# Altium PCB {TEX137}_F2837x_controlCARD_R1.3_PCB_PADS.PcbDoc (part 4 of 6)
Units mil, origin at the board's own origin, x right, y up, seen from the top; angles counter-clockwise.
Board outline 4163.98 x 2011.3 mil, 10 copper layers (Primary Side, Inner Layer 2, Inner Layer 3, Inner Layer 4, Inner Layer 5, Inner Layer 6, Inner Layer 7, Inner Layer 8, Inner Layer 9, Secondary Side), stack 103.5 mil thick; 292 components, 317 nets, 1400 pads, 1032 vias.
Unrouted connection lines stored in the file: 106.
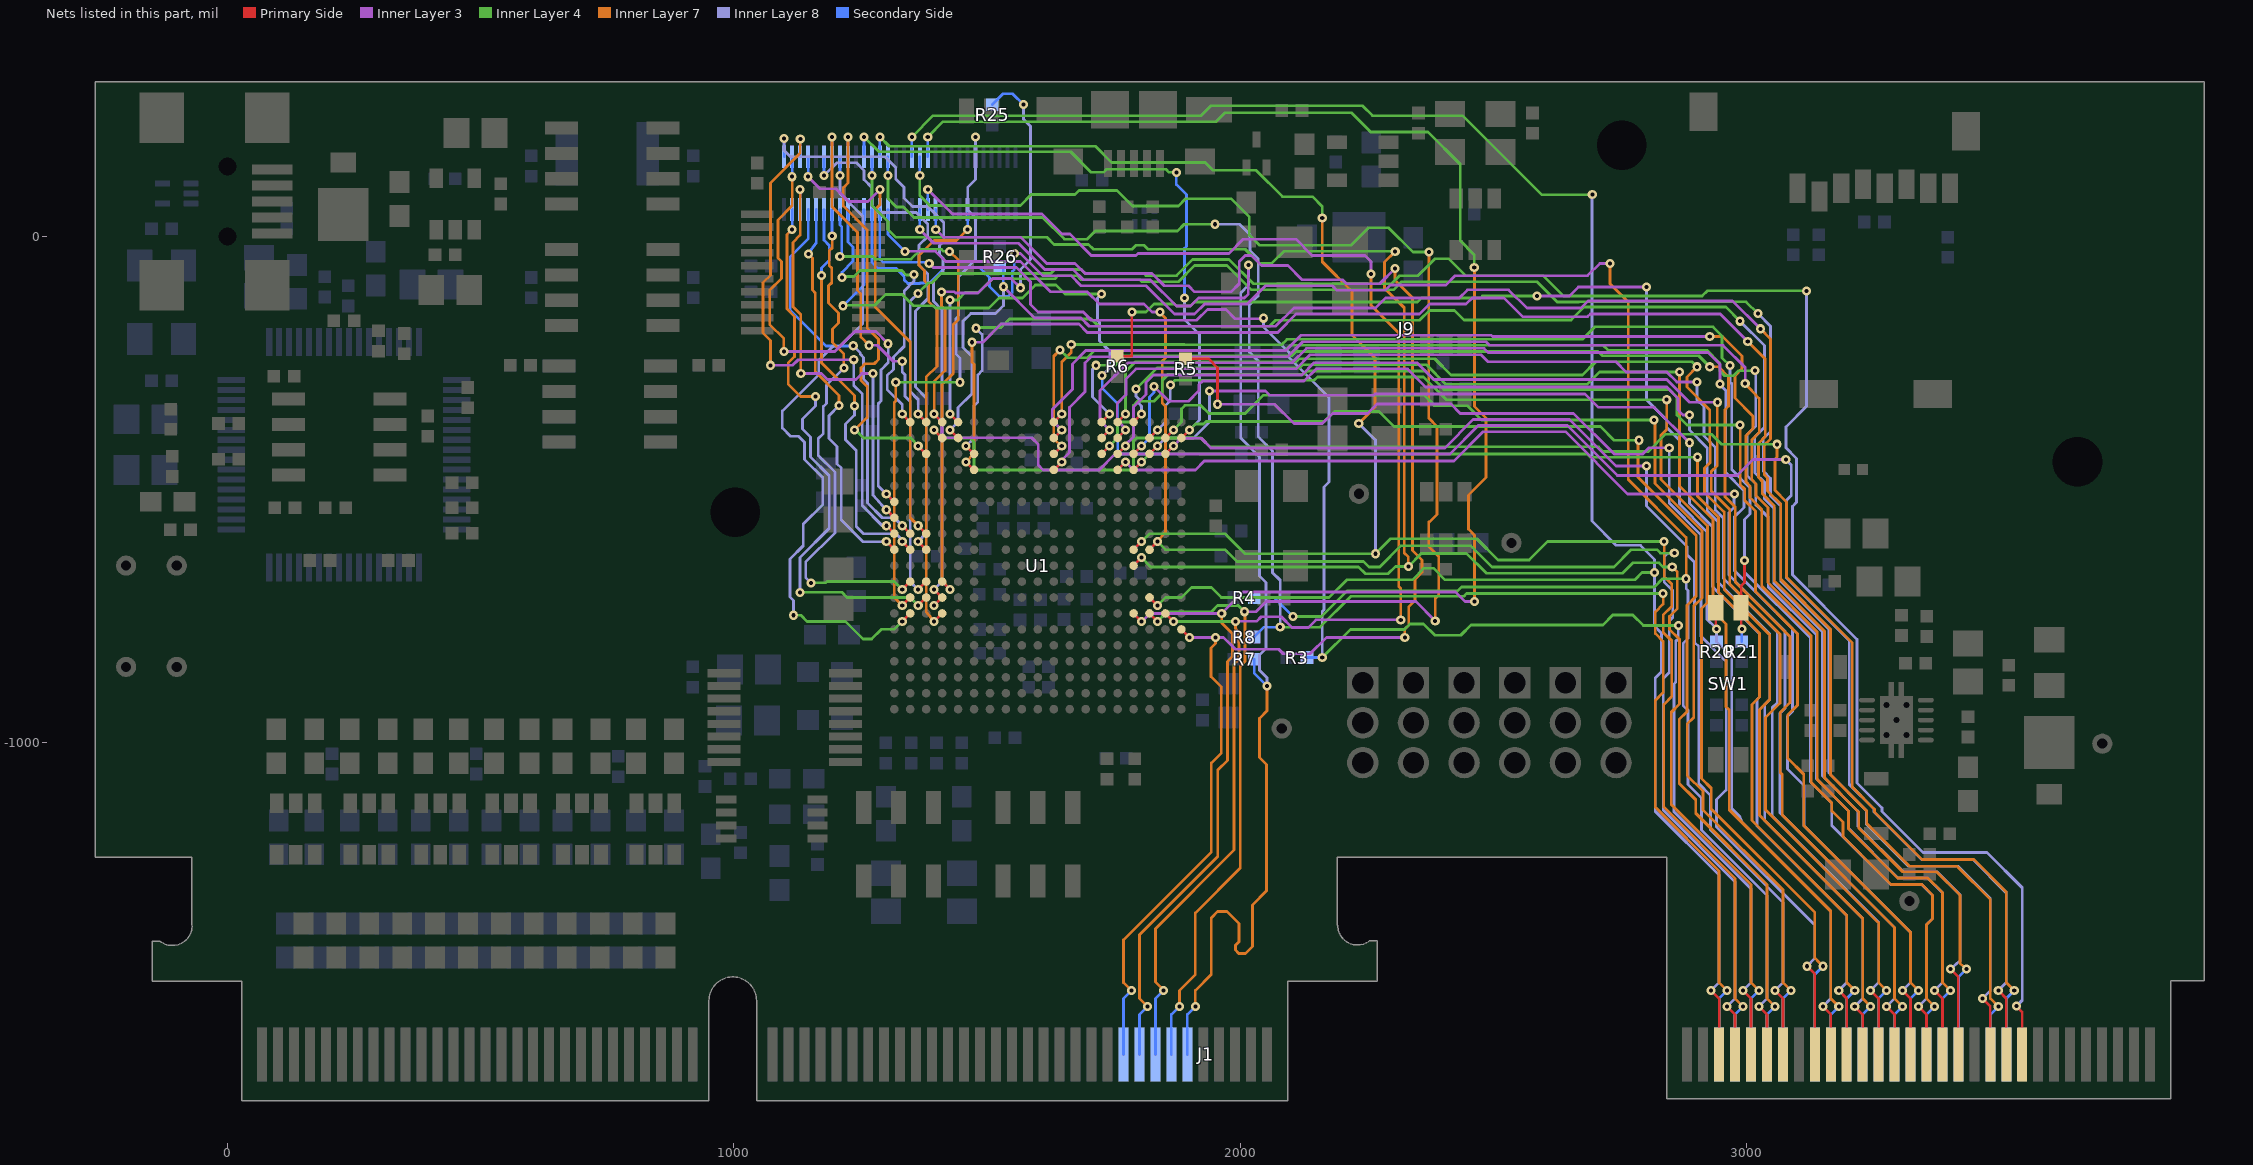
[diagram p12: the nets of this part, all layers, seen from the top]

## Via types
v1: diameter 18, hole 8, Primary Side to Secondary Side, 1025 vias
v2: diameter 28, hole 10, Primary Side to Secondary Side, 7 vias

## Nets (pads, with @x,y where several pads share a name; then routed paths per layer and width w, separated by ;. In a path a pad name is that pad's centre, name@x,y a point inside that pad or via, vN(x,y) a via of type N, cw(c..) or ccw(c..) an arc to the next point about the centre after c; other vN are vias at no path point) (continued)
MCU_GPIO-55_L: J1.102 J9.39 U1.P19 | length 3255.5
  Primary Side w5.3: U1.P19@1883.46,-775.98 v1(1899.21,-791.73)
  Inner Layer 3 w5.5: v1(1398.46,13.85) 1413.85,-1.54 1565.54,-1.54 1617.54,-53.54 1673.54,-53.54 1693.54,-73.54 1825.54,-73.54 1849.54,-97.54 1897.54,-97.54 1909.54,-109.54 1981.54,-109.54 1997.54,-93.54 1997.54,-49.54 2009.54,-37.54 2021.54,-37.54 2041.54,-57.54 2093.54,-57.54 2121.54,-85.54 2201.54,-85.54 2209.54,-93.54 2275.01,-93.54 v1(2305.01,-63.54) ; v1(1899.21,-791.73) 1950.44,-791.73 1966.79,-791.76 1990.05,-815.02 2075.52,-815.02 2084.52,-824.02 2137.51,-824.02 2169.77,-792.03 v1(2324.48,-792.03)
  Inner Layer 7 w5.5: v1(1784.93,-1489.1) 1769.18,-1473.35 1769.18,-1388.85 1942.54,-1215.5 1942.54,-1039.48 1962.23,-1019.79 1962.23,-889.49 1941.97,-869.23 1941.97,-812.48 1950.67,-803.78 1950.67,-791.97 v1(1950.47,-791.76) ; v1(2305.01,-63.54) 2305.01,-86.62 2339.48,-121.1 2339.48,-620.03 2358.48,-639.03 2358.48,-663.06 2344.51,-677.03 2344.51,-718.92 2332.41,-731.02 2332.41,-767.1 2324.48,-775.03 v1(2324.48,-792.03)
  Secondary Side w5.3: v1@1398.43,13.85 J9.39@1398.43,53.22 ; J1.102@1769.17,-1615.1 1769.17,-1504.85 ; 1769.18,-1504.85 v1(1784.93,-1489.1)
MCU_GPIO-56_L: J1.104 J9.38 U1.N16 | length 3736.1
  Primary Side w5.3: U1.N16@1788.98,-744.49 v1(1804.73,-760.24)
  Inner Layer 3 w5.5: v1(1804.73,-760.24) 1822.46,-744.49 v1(1962.99,-744.49) 1975.33,-731.83 2005.13,-702.03 2424.62,-702.03 2443.48,-720.89 v1(2462.35,-720.89)
  Inner Layer 4 w5.5: v1(1382.68,196.53) 1412.62,226.47 1952.27,226.47 1969.77,243.98 2219.5,243.98 2257.28,206.2 2370.24,206.2 2433.98,142.46 2433.98,-8.54 2461.54,-36.57 v1(2461.54,-61.54)
  Inner Layer 7 w5.5: v1(1816.43,-1520.6) 1800.68,-1504.85 1800.68,-1378.83 1955.29,-1224.23 1955.29,-1053.73 1974.54,-1034.48 1974.54,-839.49 1984.54,-829.49 1984.54,-784.49 1962.99,-762.94 v1(1962.99,-744.49) ; v1(2461.54,-61.54) 2462.35,-62.35 2462.35,-335.84 2484.95,-358.44 2484.95,-476.24 2450.35,-510.84 2450.35,-578.02 2462.35,-590.02 v1(2462.35,-720.89)
  Secondary Side w5.3: J9.38@1382.68,157.16 v1(1382.68,196.53) ; J1.104@1800.67,-1615.1 1800.67,-1536.35 ; 1800.68,-1536.35 v1(1816.43,-1520.6)
MCU_GPIO-57_L: J1.106 J9.37 U1.N18 | length 3160.6
  Primary Side w5.3: U1.N18@1851.97,-744.49 v1(1867.72,-760.24)
  Inner Layer 3 w5.5: v1(1382.71,92.6) 1431.35,43.96 1608.04,43.96 1647.54,4.46 1663.54,4.46 1705.54,-37.54 1793.54,-37.54 1797.54,-33.54 1977.54,-33.54 2005.54,-5.54 2109.54,-5.54 2141.54,-37.54 2245.54,-37.54 2257.49,-49.49 v1(2257.49,-74.03) ; v1(1990,-760) 2032.03,-760 2041.02,-751.02 2080.5,-751.02 2101.5,-772.02 2134.04,-772.02 2149.03,-757.02 v1(2316.51,-757.02)
  Inner Layer 4 w5.5: v1(1867.72,-760.24) 1989.76,-760.24 v1(1990,-760)
  Inner Layer 7 w5.5: v1(1847.93,-1489.1) 1847.93,-1487.58 1832.18,-1471.83 1832.18,-1366.83 1987.54,-1211.48 1987.54,-844.49 1996.97,-835.06 1996.97,-781.46 1990,-774.49 v1(1990,-760) ; v1(2257.49,-74.03) 2257.49,-135.88 2312.48,-190.87 2312.48,-690.92 2316.51,-695.02 v1(2316.51,-757.02)
  Secondary Side w5.3: J9.37@1382.68,53.22 v1(1382.71,92.6) ; J1.106@1832.17,-1615.1 1832.17,-1504.85 ; 1832.18,-1504.85 v1(1847.93,-1489.1)
MCU_GPIO-58_L: J1.108 J9.36 U1.N17 | length 3514.5
  Primary Side w5.3: U1.N17@1820.47,-744.49 v1(1836.22,-760.24)
  Inner Layer 3 w5.5: v1(2008,-741) 2031.03,-741 2051,-721.03 2346.48,-721.03 v1(2384.48,-759.03)
  Inner Layer 4 w5.5: v1(1366.96,120.16) 1366.96,80.78 1386.65,61.1 1565.54,61.1 1586.9,82.46 1673.54,82.46 1681.54,90.46 1756.54,90.46 1787.02,59.98 1877.54,59.98 1892.02,74.46 1981.54,74.46 2017.54,38.46 2017.54,2.46 2037.54,-17.54 2218.24,-17.54 2252.74,16.97 2292.47,16.97 2340.44,-31 v1(2372,-31) ; v1(1836.22,-760.24) 1855.46,-741 1942.53,-741 1954.8,-728.73 1995.73,-728.73 v1(2008,-741)
  Inner Layer 7 w5.5: v1(1879.43,-1520.6) 1879.43,-1489.1 1910.93,-1457.6 1910.93,-1335.58 1999.54,-1246.98 1999.54,-848.95 2009,-839.49 2009,-742 v1(2008,-741) ; v1(2372,-31) 2372,-47 2371.72,-47.28 2371.72,-358.84 2387.95,-375.07 2387.95,-548.84 2372.95,-563.84 2371.72,-563.84 2371.72,-612.02 2391.4,-631.71 2391.4,-708.14 2384.48,-715.06 v1(2384.48,-759.03)
  Secondary Side w5.3: v1@1366.93,120.16 J9.36@1366.93,157.16 ; J1.108@1863.67,-1615.1 1863.67,-1536.35 ; 1863.68,-1536.35 v1(1879.43,-1520.6)
MCU_GPIO-59_L: J1.110 J9.35 R7.1 | length 2744.5
  Inner Layer 3 w5.5: v1(1366.96,13.85) 1394.39,-13.58 1561.58,-13.58 1613.54,-65.54 1669.54,-65.54 1689.54,-85.54 1821.54,-85.54 1873.54,-137.54 1901.54,-137.54 1917.54,-121.54 2007.51,-121.54 2015.51,-113.54 2015.51,-57.03 v1(2016.01,-56.54)
  Inner Layer 7 w5.5: v1(1910.93,-1520.6) 1910.93,-1489.1 1942.43,-1457.6 1942.43,-1345.58 1954.91,-1333.1 1973.68,-1333.1 1997.18,-1356.6 1997.18,-1392.6 1990.18,-1399.6 1990.18,-1409.1 1996.68,-1415.6 2010.04,-1415.6 2023.54,-1402.1 2023.54,-1319.98 2051.54,-1291.98 2051.54,-1042.48 2037.54,-1028.48 2037.54,-951.51 2052.46,-936.58 v1(2052.46,-887.51)
  Inner Layer 8 w5.5: v1(2016.01,-56.54) 2016.01,-96.06 2000.48,-111.58 2000.48,-398.42 2037.54,-435.47 2037.54,-670.5 2050.48,-683.45 2050.48,-813.56 2037.54,-826.5 2037.54,-856.51 2052.46,-871.44 v1(2052.46,-887.51)
  Secondary Side w5.3: v1@1366.93,13.85 J9.35@1366.93,53.22 ; J1.110@1895.17,-1615.1 1895.17,-1536.35 ; 1895.18,-1536.35 v1(1910.93,-1520.6) ; R7.1@2027.03,-835.02 2027.03,-862.08 v1(2052.46,-887.51)
MCU_GPIO-60_L: J1.125 J9.34 U1.M17 | length 4400
  Primary Side w5.3: U1.M17@1820.47,-712.99 v1(1836.22,-728.74) ; v1(2929.26,-1489.1) 2945,-1504.85 J1.125@2945,-1615.1
  Inner Layer 4 w5.5: v1(1351.18,196.53) 1392.93,238.28 1922.51,238.28 1942.2,257.98 2240.82,257.98 2260.51,238.28 2438.7,238.28 2594.64,82.34 v1(2694.63,82.34) ; v1(1836.22,-728.74) 1851.94,-713.02 1883.54,-713.02 1903.23,-693.33 1942.6,-693.33 1962.28,-713.02 2175,-713.02 2209.91,-678.1 2339.51,-678.1 2362.59,-655.02 2381.02,-655.02 2404.1,-678.1 2778.39,-678.1 2793.01,-663.48 v1(2817.54,-663.48)
  Inner Layer 8 w5.5: v1(2694.63,82.34) 2694,81.71 2694,-562 2742,-610 2789.54,-610 2817.54,-638 v1(2817.54,-663.48) 2817.54,-769.48 2831.54,-783.48 2831.54,-859.46 2819.01,-871.99 2819.01,-1135.05 2945.01,-1261.05 2945.01,-1473.35 v1(2929.26,-1489.1)
  Secondary Side w5.3: J9.34@1351.18,157.16 v1(1351.18,196.53)
MCU_GPIO-61_L: J1.126 J9.28 R8.1 | length 3503.1
  Inner Layer 4 w5.5: v1(1303.96,120.16) 1303.96,74.49 1320.47,57.98 1334.64,57.98 1355.15,37.47 1609.54,37.47 1652.51,-5.51 1697.48,-5.51 1713.45,10.46 1875.45,10.46 1888.96,23.98 v1(1949.49,23.97) ; v1(2078.51,-771.54) 2157.04,-771.54 2217.97,-710.6 2440.99,-710.6 2446.48,-705.1 v1(2834.56,-705.1)
  Inner Layer 7 w5.5: v1(2834.56,-705.1) 2834.56,-726.1 2819.06,-741.6 2819.06,-783.98 2834.56,-799.48 2834.56,-900.46 2818.94,-916.05 2818.94,-1126.85 2945.01,-1252.92 2945.01,-1473.35 v1(2960.76,-1489.1)
  Inner Layer 8 w5.5: v1(1949.49,23.97) 1998.07,23.97 2018.88,3.16 2018.88,-27.91 2035,-44.03 2035,-117.54 2017.54,-135 2017.54,-228.07 2035,-245.54 2035,-394.96 2063.54,-423.5 2063.54,-664.02 2078.51,-679 2078.51,-760.02 v1(2078.51,-771.54)
  Secondary Side w5.3: v1@1303.94,120.16 J9.28@1303.94,157.16 ; R8.1@2027.03,-791.02 2046.51,-771.54 v1(2078.51,-771.54) ; J1.126@2945.01,-1615.1 2945.01,-1504.85 v1(2960.76,-1489.1)
MCU_GPIO-62_L: J1.127 J9.27 U1.J17 | length 3326.1
  Primary Side w5.5: U1.J17@1820.47,-618.5 v1(1836.26,-602.77) ; v1(2960.76,-1520.6) 2976.5,-1536.34 J1.127@2976.5,-1615.1
  Inner Layer 3 w5.5: v1(1337.54,-29.54) 1398.29,-29.54 1418.29,-49.54 1565.54,-49.54 1625.54,-109.54 1697.54,-109.54 1721.54,-133.54 1809.54,-133.54 1825.54,-149.54 v1(1841.54,-149.54)
  Inner Layer 4 w5.5: v1(1836.26,-602.77) 1851.97,-618.48 1969.61,-618.48 1992.82,-641.69 2242.67,-641.69 2253.59,-652.6 2275.09,-652.6 2317.09,-610.6 2454.51,-610.6 2496.51,-652.6 2737.41,-652.6 2771.53,-618.48 2822.54,-618.48 2829.54,-625.48 v1(2856.54,-625.48)
  Inner Layer 7 w5.5: v1(1836.26,-602.77) 1851.97,-584.03 1851.97,-335.55 1845.54,-329.12 1845.54,-246.46 1851.97,-240.03 1851.97,-161.54 1841.54,-151.1 v1(1841.54,-149.54)
  Inner Layer 8 w5.5: v1(2856.54,-625.48) 2843.54,-625.48 2836.54,-632.48 2836.54,-682.48 2853.54,-699.48 2853.54,-752.48 2846.54,-759.48 2846.54,-860.81 2834.76,-872.58 2834.76,-1132.8 2976.51,-1274.55 2976.51,-1504.85 v1(2960.76,-1520.6)
  Secondary Side w5.5: J9.27@1303.94,53.22 1303.94,4.06 v1(1337.54,-29.54)
MCU_GPIO-63_L: J1.128 J9.26 U1.J16 | length 3958.2
  Primary Side w5.3: U1.J16@1788.98,-618.5 v1(1804.73,-602.75)
  Inner Layer 4 w5.5: v1(1288.18,196.53) 1306.75,177.97 1713.54,177.97 1745.54,145.97 1930.49,145.97 1945.99,130.46 2031.02,130.46 2083.09,78.4 2142.05,78.4 2161.49,58.97 v1(2161.49,35.97) ; v1(1804.73,-602.75) 1820.46,-587.02 1969.33,-587.02 2008.91,-626.6 v1(2266.48,-626.6) 2296.06,-597.02 2466.51,-597.02 2508.51,-639.02 2569.97,-639.02 2606.51,-602.48 v1(2836.54,-602.48)
  Inner Layer 7 w5.5: v1(2161.49,35.97) 2161.49,-50.03 2220.01,-108.55 2220.01,-194.54 2265.54,-240.06 2265.54,-337.54 v1(2233.54,-369.54) ; v1(2836.54,-602.48) 2836.54,-671.48 2851.54,-686.48 2851.54,-730.6 2834.56,-747.58 2834.56,-781.48 2851.54,-798.45 2851.54,-908.46 2835.91,-924.09 2835.91,-1126.85 2976.51,-1267.46 2976.51,-1504.85 v1(2992.26,-1520.6)
  Inner Layer 8 w5.5: v1(2233.54,-369.54) 2265.54,-401.54 2266.48,-401.54 v1(2266.48,-626.6)
  Secondary Side w5.3: J9.26@1288.19,157.16 v1(1288.18,196.53) ; J1.128@2976.51,-1615.1 2976.51,-1536.35 v1(2992.26,-1520.6)
MCU_GPIO-64_L: J1.129 J9.25 R3.2 | length 3399.5
  Primary Side w5.3: v1(2992.26,-1489.1) 3008,-1504.84 J1.129@3008,-1615.1
  Inner Layer 3 w5.5: v1(1385.54,-53.54) 1393.54,-61.54 1557.54,-61.54 1585.54,-89.54 1585.54,-134.54 1600.54,-149.54 1689.54,-149.54 1705.54,-165.54 1913.54,-165.54 1934.79,-144.28 1971.28,-144.28 1989.54,-162.54 2045.54,-162.54 v1(2045.54,-161.54)
  Inner Layer 4 w5.5: v1(2161.54,-831.54) 2217.04,-776.03 2323.48,-776.03 2334.48,-765.03 2361.48,-765.03 2383.98,-787.53 2434.98,-787.53 2455.52,-766.99 2715.5,-766.99 2735.01,-747.48 2774.44,-747.48 2795.44,-768.48 v1(2864.54,-768.48)
  Inner Layer 8 w5.5: v1(2045.54,-161.54) 2045.54,-178.91 2096.16,-229.54 2096.16,-239.14 2174.91,-317.89 2174.91,-485.02 2165.06,-494.86 2165.06,-737.05 2161.54,-740.57 v1(2161.54,-831.54) ; v1(2864.54,-768.48) 2864.54,-794.1 2859.36,-799.28 2859.36,-880.03 2855.89,-883.5 2855.89,-1135.93 3008.01,-1288.05 3008.01,-1473.35 v1(2992.26,-1489.1)
  Secondary Side w5.3: J9.25@1288.19,53.22 1288.19,-44.49 1294.63,-50.92 1382.92,-50.92 v1(1385.54,-53.54) ; R3.2@2131.54,-831.54 v1(2161.54,-831.54)
MCU_GPIO-65_L: J1.130 J9.24 U1.K16 | length 4047.8
  Primary Side w5.3: U1.K16@1788.98,-650 v1(1804.73,-634.25)
  Inner Layer 4 w5.5: v1(1272.46,120.16) 1272.46,61.1 1303.93,29.6 1303.93,13.85 1319.32,-1.54 1617.54,-1.54 1632.02,-16.02 1700.02,-16.02 1709.54,-25.53 1785.54,-25.53 1793.53,-17.54 1809.54,-17.54 1817.54,-25.53 2009.54,-25.53 2037.54,-53.54 2061.53,-53.54 2085.53,-29.54 v1(2305.51,-29.54) ; v1(1804.73,-634.25) 1822.96,-652.48 2233.19,-652.48 2246.71,-666 2291.48,-666 2305.96,-651.52 v1@2331.48,-651.52 ; v1(2331.48,-652.03) v1@2331.48,-651.52 ; v1(2852.54,-652.48) 2834.54,-652.48 2826.54,-644.48 2774.54,-644.48 2754.01,-665 2485.51,-665 2446.53,-626.02 2356.98,-626.02 v1@2331.48,-651.52
  Inner Layer 7 w5.5: v1(2305.51,-29.54) 2284.51,-50.54 2284.51,-102.54 2323.48,-141.02 2323.48,-625.03 2331.48,-633.03 v1(2331.48,-652.03) ; v1(2852.54,-652.48) 2862.54,-662.48 2862.54,-734.48 2846.91,-750.1 2846.91,-775.83 2866.54,-795.45 2866.54,-923.46 2850.44,-939.56 2850.44,-1121.91 3008.01,-1279.48 3008.01,-1473.35 v1(3023.76,-1489.1)
  Secondary Side w5.3: v1@1272.44,120.16 J9.24@1272.44,157.16 ; J1.130@3008.01,-1615.1 3008.01,-1504.85 v1(3023.76,-1489.1)
MCU_GPIO-66_L: J1.131 J9.23 R4.2 | length 4417.5
  Primary Side w5.3: v1(3023.75,-1520.6) 3039.49,-1536.34 J1.131@3039.49,-1615.1
  Inner Layer 3 w5.5: v1(1553.54,-33.54) 1565.54,-33.54 1609.54,-77.54 1665.54,-77.54 1685.54,-97.54 1813.54,-97.54 1869.54,-153.54 1909.54,-153.54 1929.54,-133.54 2013.54,-133.54 2049.54,-97.54 2181.54,-97.54 2190.56,-106.56 2285.44,-106.56 2296.23,-95.77 2405.77,-95.77 2424,-77.54 2685.54,-77.54 2709.54,-53.54 v1(2729.54,-53.54)
  Inner Layer 4 w5.5: v1(2103.54,-750.54) 2160.04,-750.54 2210.51,-700.06 2428.72,-700.06 2436.48,-692.3 2817.21,-692.3 2833.53,-675.98 v1(2880,-675.98)
  Inner Layer 7 w5.5: v1(2729.54,-53.54) 2729.54,-93.54 2765.53,-129.54 2765.53,-480.06 2880,-594.53 v1(2880,-675.98)
  Inner Layer 8 w5.5: v1(2880,-675.98) 2880,-695.48 2883.54,-699.02 2883.54,-794.1 2874.06,-803.58 2874.06,-926.1 2883.54,-935.58 2883.54,-1082.1 2910.06,-1108.63 2910.06,-1172.1 3039.51,-1301.55 3039.51,-1504.84 v1(3023.75,-1520.6)
  Secondary Side w5.3: J9.23@1272.44,53.22 1272.44,-51.51 1284.25,-63.32 1320.47,-63.32 1336.22,-79.07 1336.22,-86.03 1343.22,-93.03 1366.99,-93.03 1368,-92.02 1385.99,-92.02 1416.99,-61.02 1484.46,-61.02 1504.46,-81.02 1504.46,-99.02 1523.98,-118.54 1541.54,-118.54 1549.54,-110.54 1549.54,-68.98 1553.54,-64.98 v1(1553.54,-33.54) ; R4.2@2027.03,-713.02 2066.02,-713.02 v1(2103.54,-750.54)
MCU_GPIO-67_L: J1.132 J9.22 U1.B19 | length 3538.2
  Primary Side w5.3: U1.B19@1883.46,-398.03 v1(1899.21,-382.28)
  Inner Layer 4 w5.5: v1(1256.68,196.53) 1286.25,166.97 1665.03,166.97 1705.54,126.46 1729.54,126.46 1735.55,132.48 1853,132.48 1859.02,126.46 v1(1873.54,126.46) ; v1(1899.21,-382.28) 1911.05,-370.45 1926.82,-370.45 1931.73,-365.54 2165.54,-365.54 2185.54,-345.54 2273.54,-345.54 2303.13,-375.13 2710.46,-375.13 2737.81,-402.48 v1(2786.54,-402.48)
  Inner Layer 7 w5.5: v1(2786.54,-402.48) 2785.04,-402.48 2785.04,-475.56 2899.98,-590.5 2899.98,-710.02 2881.54,-728.46 2881.54,-938.46 2866.19,-953.81 2866.19,-1079.6 2898.84,-1112.25 2898.84,-1138.81 3039.51,-1279.48 3039.51,-1504.85 v1(3055.26,-1520.6)
  Inner Layer 8 w5.5: v1(1889.54,-121.54) 1889.54,-164.14 1918.93,-193.54 1918.93,-362.56 v1(1899.21,-382.28)
  Secondary Side w5.3: J9.22@1256.69,157.16 v1(1256.68,196.53) ; v1(1873.54,126.46) 1873.54,102.46 1893.54,82.46 1893.54,-19.65 1889.54,-23.65 v1(1889.54,-121.54) ; J1.132@3039.51,-1615.1 3039.51,-1536.35 v1(3055.26,-1520.6)
MCU_GPIO-68_L: J1.133 J9.21 U1.C18 | length 3544.2
  Primary Side w5.3: U1.C18@1851.97,-429.53 v1(1867.72,-413.78) ; v1(3055.25,-1489.1) 3070.99,-1504.84 J1.133@3070.99,-1615.1
  Inner Layer 3 w5.5: v1(1867.72,-413.78) 1882.98,-398.52 1922.52,-398.52 1941.54,-417.54 2403.46,-417.54 2459.46,-361.54 2649.54,-361.54 2741.54,-453.54 v1(2801.54,-453.54)
  Inner Layer 4 w5.5: v1(1215.48,-137.03) 1216.48,-136.03 1277.96,-136.03 1299.48,-114.51 1332.23,-114.51 1354.75,-137.03 1393.54,-137.03 1398.04,-141.54 1503.49,-141.54 1523.49,-121.54 1569.54,-121.54 1595.04,-96.03 1636.03,-96.03 1653.54,-113.54 v1(1725.54,-113.54)
  Inner Layer 8 w5.5: v1(1725.54,-113.54) 1717.54,-121.54 1717.54,-165.54 1721.54,-169.54 1721.54,-206.35 1741.97,-226.78 1741.97,-259.49 v1(1726.97,-274.49) ; v1(2801.54,-453.54) 2801.54,-532.48 2881.54,-612.48 2881.54,-628.48 2896.53,-643.47 2896.53,-801.53 2905,-810 2905,-1080.57 2928.06,-1103.63 2928.06,-1172.1 3071.01,-1315.05 3071.01,-1473.34 v1(3055.25,-1489.1)
  Secondary Side w5.3: v1(1215.48,-137.03) 1256.69,-95.82 J9.21@1256.69,53.22 ; v1(1726.97,-274.49) 1726.97,-299.49 1757.48,-330 1757.48,-425 1761.97,-429.49 1852.01,-429.49 v1(1867.72,-413.78)
MCU_GPIO-69_L: J1.134 U1.B18 | length 2444.6
  Primary Side w5.3: U1.B18@1851.97,-398.03 v1(1867.72,-382.28)
  Inner Layer 4 w5.5: v1(1867.72,-382.28) 1883.51,-366.49 1883.51,-340.5 1890.48,-333.54 1921.54,-333.54 1937.54,-349.54 2009.54,-349.54 2045.54,-313.54 2362.54,-313.54 2383.5,-334.5 2448.02,-334.5 2476,-362.48 v1(2816.54,-362.48)
  Inner Layer 7 w5.5: v1(2816.54,-362.48) 2818.54,-362.48 2818.54,-488.06 2910.98,-580.5 2910.98,-714.02 2895,-730 2895,-950 2881.94,-963.06 2881.94,-1064.1 2913.19,-1095.35 2913.19,-1132.14 3071.01,-1289.96 3071.01,-1473.35 v1(3086.76,-1489.1)
  Secondary Side w5.3: J1.134@3071.01,-1615.1 3071.01,-1504.85 v1(3086.76,-1489.1)
MCU_GPIO-70_L: J1.137 R5.2 | length 2457.6
  Primary Side w5.3: R5.2@1891.54,-241.54 1936.54,-241.54 1954.54,-259.54 v1(1954.54,-331.48) ; v1(3118.26,-1441) 3133.98,-1456.72 J1.137@3133.98,-1615.1
  Inner Layer 3 w5.5: v1(1954.54,-331.48) 2067.48,-331.48 2105.54,-369.54 2161.54,-369.54 2181.54,-349.54 2251,-349.54 2269.54,-331 2415.46,-331 2434,-349.54 2657.54,-349.54 2738.1,-430.1 2793.56,-430.1 2806.18,-417.48 v1(2846.54,-417.48)
  Inner Layer 8 w5.5: v1(2846.54,-417.48) 2846.54,-526.58 2909.47,-589.51 2909.47,-789.47 2958.97,-838.97 2958.97,-1093.19 2940.06,-1112.1 2940.06,-1166.1 3134.01,-1360.05 3134.01,-1424.5 v1(3118.26,-1441)
MCU_GPIO-71_L: J1.138 U1.B17 | length 2572.4
  Primary Side w5.3: U1.B17@1820.47,-398.03 v1(1836.22,-382.28)
  Inner Layer 4 w5.5: v1(1861.54,-293.54) 1870.97,-284.1 2145.54,-284.1 2152.1,-277.54 2361.59,-277.54 2406.54,-322.48 v1(2841.54,-322.48)
  Inner Layer 7 w5.5: v1(2841.54,-322.48) 2841.54,-381.48 2830.54,-392.48 2830.54,-480.06 2921.98,-571.5 2921.98,-723.02 2910,-735 2910,-1070 2929.53,-1089.53 2929.53,-1130.47 3134.01,-1334.96 3134.01,-1424.5 v1(3149.76,-1441)
  Inner Layer 8 w5.5: v1(1836.22,-382.28) 1851.97,-366.54 1851.97,-333.54 1861.54,-323.97 v1(1861.54,-293.54)
  Secondary Side w5.3: J1.138@3134.01,-1615.1 3134.01,-1456.75 v1(3149.76,-1441)
MCU_GPIO-72_L: J1.139 R6.2 R20.2 SW1.2 | length 2901.2
  Primary Side w5.3: R6.2@1756.54,-236.54 1785.54,-236.54 v1(1785.54,-149.54) ; SW1.2@2938.46,-733.46 2938.46,-773.46 v1(2940,-775) ; v1(3149.76,-1520.6) 3165.48,-1536.32 J1.139@3165.48,-1615.1
  Inner Layer 3 w5.5: v1(2585.54,-117.54) 2649.48,-117.54 2667.04,-99.98 v1(2801.54,-99.98)
  Inner Layer 4 w5.5: v1(1785.54,-149.54) 1813.54,-149.54 1829.54,-133.54 1869.54,-133.54 1873.54,-137.54 1901.54,-137.54 1909.54,-129.54 2349.54,-129.54 2357.54,-121.54 2473.54,-121.54 2477.54,-117.54 v1(2585.54,-117.54)
  Inner Layer 8 w5.5: v1(2801.54,-99.98) 2801.54,-322.48 2841.54,-362.48 2841.54,-377.48 2866.54,-402.48 2866.54,-528.58 2920.47,-582.51 2920.47,-755.01 2938.98,-773.52 v1(2940,-775) 2940,-800 2970,-830 2970,-1130 2985.74,-1145 2989.26,-1155.74 3165.51,-1331.99 3165.51,-1504.85 v1(3149.76,-1520.6)
  Secondary Side w5.3: R20.2@2940,-800 v1(2940,-775)
MCU_GPIO-73_L: J1.140 U1.A16 | length 2679.7
  Primary Side w5.3: U1.A16@1788.98,-366.54 v1(1804.74,-350.78)
  Inner Layer 4 w5.5: v1(1793.54,-301.54) 1834.97,-260.1 2116.24,-260.1 2122.81,-253.54 2367.59,-253.54 2406.16,-292.1 2684.07,-292.1 2708.69,-267.48 v1(2866.54,-267.48)
  Inner Layer 7 w5.5: v1(2866.54,-267.48) 2866.54,-492.88 2932.98,-559.32 2932.98,-739.51 2958.46,-765 2958.46,-928.46 2965.1,-935.1 2965.1,-1132.07 3165.51,-1332.48 3165.51,-1504.85 v1(3181.26,-1520.6)
  Inner Layer 8 w5.5: v1(1793.54,-301.54) 1793.54,-315.58 1799.49,-321.54 1799.49,-330.03 1804.74,-335.28 v1(1804.74,-350.78)
  Secondary Side w5.3: J1.140@3165.51,-1615.1 3165.51,-1536.35 v1(3181.26,-1520.6)
MCU_GPIO-74_L: J1.141 U1.C17 | length 2550.9
  Primary Side w5.3: U1.C17@1820.47,-429.53 v1(1836.22,-413.78) ; v1(3181.26,-1489.1) 3196.97,-1504.81 J1.141@3196.97,-1615.1
  Inner Layer 3 w5.5: v1(1938.65,-305.54) 2049.54,-305.54 2057.54,-313.54 2262.95,-313.54 2265.54,-310.95 2680.01,-310.95 2706.54,-337.48 2816.54,-337.48 v1(2886.54,-407.48)
  Inner Layer 8 w5.5: v1(1836.22,-413.78) 1852.02,-397.98 1907.09,-397.98 1938.65,-366.42 v1(1938.65,-305.54) ; v1(2886.54,-407.48) 2886.54,-527.48 2931.47,-572.42 2931.47,-691.04 3025,-784.57 3025,-909.54 3020,-914.54 3020,-1163.98 3197.01,-1340.99 3197.01,-1473.35 v1(3181.26,-1489.1)
MCU_GPIO-75_L: J1.142 U1.D16 | length 2455.9
  Primary Side w5.3: U1.D16@1788.98,-461.02 v1(1804.73,-445.27)
  Inner Layer 4 w5: 1820.81,-429.48 1919.51,-429.48
  Inner Layer 4 w5.5: v1(1804.73,-445.27) 1820.52,-429.48 1820.81,-429.48 ; 1919.51,-429.48 2684.54,-429.48 2691.04,-435.98 v1(2902.54,-435.98)
  Inner Layer 7 w5.5: v1(2902.54,-435.98) 2902.54,-512.98 2943.98,-554.42 2943.98,-702.52 3025,-783.54 3025,-909.54 3010,-924.54 3010,-1153.47 3197.01,-1340.48 3197.01,-1473.35 v1(3212.76,-1489.1)
  Secondary Side w5.3: J1.142@3197.01,-1615.1 3197.01,-1504.85 v1(3212.76,-1489.1)
MCU_GPIO-76_L: J1.143 U1.C16 | length 2729.5
  Primary Side w5.3: U1.C16@1788.98,-429.53 v1(1804.73,-413.78) ; v1(3212.76,-1520.6) 3228.47,-1536.31 J1.143@3228.47,-1615.1
  Inner Layer 3 w5.5: v1(1829.49,-296.03) 1858.99,-325.54 1897.54,-325.54 1917.54,-305.54 1917.54,-293.54 1925.54,-285.54 2125.54,-285.54 2149.54,-261.54 2329.59,-261.54 2365.54,-297.48 2841.54,-297.48 2864.04,-319.98 2864.04,-342.48 2874.04,-352.48 v1(2886.54,-352.48)
  Inner Layer 8 w5.5: v1(2886.54,-352.48) 2886.54,-382.48 2921.54,-417.48 2921.54,-542.48 2942.47,-563.42 2942.47,-682.51 3045,-785.04 3045,-914.54 3035,-924.54 3035,-1153.49 3228.51,-1347 3228.51,-1504.85 v1(3212.76,-1520.6)
  Secondary Side w5.3: v1(1804.73,-413.78) 1820.5,-398 1820.5,-317.03 1829.49,-308.05 v1(1829.49,-296.03)
MCU_GPIO-77_L: J1.144 U1.A15 | length 2821.6
  Primary Side w5.3: U1.A15@1757.48,-366.54 v1(1773.23,-350.79)
  Inner Layer 4 w5.5: v1(1773.23,-350.79) 1773.23,-267.29 1793.04,-247.48 2109.54,-247.48 2115.48,-241.54 2383.54,-241.54 2415.48,-273.48 2675.48,-273.48 2701.48,-247.48 2891.54,-247.48 v1(2901.54,-257.48)
  Inner Layer 7 w5.5: v1(2901.54,-257.48) 2881.54,-277.48 2881.54,-297.48 2926.54,-342.48 2926.54,-405.48 2927.54,-406.48 2927.54,-446.1 2916.06,-457.58 2916.06,-505.3 2954.98,-544.22 2954.98,-696.97 3045,-786.99 3045,-914.54 3025,-934.54 3025,-1142.97 3228.51,-1346.48 3228.51,-1504.85 v1(3244.26,-1520.6)
  Secondary Side w5.3: J1.144@3228.51,-1615.1 3228.51,-1536.35 v1(3244.26,-1520.6)
MCU_GPIO-78_L: J1.145 U1.B15 | length 2803.9
  Primary Side w5.3: U1.B15@1757.48,-398.03 v1(1773.23,-382.28) ; v1(3244.26,-1489.1) 3259.96,-1504.81 J1.145@3259.96,-1615.1
  Inner Layer 3 w5.5: v1(1773.23,-382.28) 1773.23,-379.79 1756.98,-363.54 1756.98,-329.54 1773.98,-312.54 1773.98,-281.54 1793.98,-261.54 2109.54,-261.54 2137.39,-233.68 2474.68,-233.68 2488.48,-247.48 2741.54,-247.48 2761.54,-267.48 2841.54,-267.48 2861.54,-287.48 v1(2901.54,-287.48)
  Inner Layer 8 w5.5: v1(2901.54,-287.48) 2901.54,-322.48 2915.04,-335.98 2915.04,-393.98 2937.54,-416.48 2937.54,-540.48 2953.47,-556.42 2953.47,-675.51 3060,-782.04 3060,-920.54 3050,-930.54 3050,-1143.99 3260.01,-1354 3260.01,-1473.35 v1(3244.26,-1489.1)
MCU_GPIO-79_L: J1.146 U1.C15 | length 2806.8
  Primary Side w5.3: U1.C15@1757.48,-429.53 v1(1773.23,-413.78)
  Inner Layer 3 w5.5: v1(1773.23,-413.78) 1773.23,-411.48 1788.98,-395.73 1788.98,-337.01 1813.54,-312.45 1813.54,-288.48 1828.48,-273.54 2121.54,-273.54 2145.54,-249.54 2348.59,-249.54 2381.54,-282.48 2841.54,-282.48 2886.54,-327.48 v1(2941.54,-327.48)
  Inner Layer 7 w5.5: v1(2941.54,-327.48) 2941.54,-452.1 2929.54,-464.1 2929.54,-502.88 2965.98,-539.32 2965.98,-686.52 3065,-785.54 3065,-921.54 3036.54,-950 3036.54,-1132.01 3260.01,-1355.48 3260.01,-1473.35 v1(3275.76,-1489.1)
  Secondary Side w5.3: J1.146@3260.01,-1615.1 3260.01,-1504.85 v1(3275.76,-1489.1)
MCU_GPIO-80_L: J1.147 U1.D15 | length 2580.9
  Primary Side w5.3: U1.D15@1757.48,-461.02 v1(1773.23,-445.27) ; v1(3275.76,-1520.6) 3291.51,-1536.35 3291.51,-1615.05 J1.147@3291.46,-1615.1
  Inner Layer 3 w5.5: v1(1773.23,-445.27) 1788.98,-461.02 1911.01,-461.02 1928.49,-443.54 2421.46,-443.54 2479.46,-385.54 2641.54,-385.54 2764.48,-508.48 v1(2975.04,-508.48)
  Inner Layer 8 w5.5: v1(2975.04,-508.48) 2974.54,-508.48 2974.54,-535 2964.47,-545.06 2964.47,-668.51 3075,-779.04 3075,-931.54 3065,-941.54 3065,-1137.94 3291.51,-1364.46 3291.51,-1504.85 v1(3275.76,-1520.6)
MCU_GPIO-81_L: J1.148 U1.A14 | length 2925.2
  Primary Side w5.3: U1.A14@1725.98,-366.54 v1(1741.73,-350.79)
  Inner Layer 4 w5.5: v1(1715.01,-254.54) 1752.68,-254.54 1771.51,-235.7 2101.54,-235.7 2110.21,-227.03 2705.81,-227.03 2714.48,-235.7 2904.76,-235.7 v1(2926.54,-257.48)
  Inner Layer 7 w5.5: v1(2926.54,-257.48) 2943.84,-257.48 2963.76,-277.4 2963.76,-335.25 2956.54,-342.48 2956.54,-513.98 2976.98,-534.42 2976.98,-682.47 3085,-790.49 3085,-920.61 3065.61,-940 3065.61,-1058.56 3069.76,-1062.71 3069.76,-1142.72 3099.54,-1172.51 3291.51,-1364.48 3291.51,-1504.85 v1(3307.26,-1520.6)
  Inner Layer 8 w5.5: v1(1715.01,-254.54) 1707.73,-261.82 1707.73,-316.78 v1(1741.73,-350.79)
  Secondary Side w5.3: J1.148@3291.51,-1615.1 3291.51,-1536.35 v1(3307.26,-1520.6)
MCU_GPIO-82_L: J1.149 U1.B14 | length 2936.9
  Primary Side w5.3: U1.B14@1725.98,-398.03 v1(1741.73,-382.28) ; v1(3307.26,-1489.1) 3322.96,-1504.8 J1.149@3322.96,-1615.1
  Inner Layer 3 w5.5: v1(1741.73,-382.28) 1722.68,-363.23 1722.68,-304.39 1777.54,-249.54 2101.54,-249.54 2130.04,-221.03 2481.03,-221.03 2489.28,-229.28 2923.32,-229.28 2946.56,-252.48 v1(2946.56,-291.1)
  Inner Layer 8 w5.5: v1(2946.56,-291.1) 2945.54,-292.13 2945.54,-291.48 2958.06,-304.01 2958.06,-466.55 2994.06,-502.55 2994.06,-535 2975.47,-553.59 2975.47,-660.04 3090,-774.57 3090,-937.54 3080,-947.54 3080,-1051.3 3112.63,-1083.93 3112.63,-1163.57 3323.01,-1373.96 3323.01,-1473.35 v1(3307.26,-1489.1)
MCU_GPIO-83_L: J1.150 U1.C14 | length 2850.3
  Primary Side w5.3: U1.C14@1725.98,-429.53 v1(1741.73,-413.78)
  Inner Layer 4 w5.5: v1(1741.73,-413.78) 1757.52,-397.99 1757.52,-370.44 1761.46,-366.5 1781.15,-366.5 1789.02,-358.62 1789.02,-333.54 1797.02,-325.54 1829.54,-325.54 1845.54,-309.54 1845.54,-284.1 1857.54,-272.1 2125.54,-272.1 2132.1,-265.54 2364.59,-265.54 2401.54,-302.48 2846.54,-302.48 2861.54,-317.48 2861.54,-352.48 2881.54,-372.48 v1(2986.54,-372.48)
  Inner Layer 7 w5.5: v1(2986.54,-372.48) 2986.54,-490.18 2995.56,-499.2 2995.56,-521.2 3016.8,-542.44 3016.8,-701.4 3100,-784.6 3100,-925.59 3080.36,-945.22 3080.36,-1030 3112.16,-1061.8 3112.16,-1163.11 3323.01,-1373.96 3323.01,-1473.35 v1(3338.76,-1489.1)
  Secondary Side w5.3: J1.150@3323.01,-1615.1 3323.01,-1504.85 v1(3338.76,-1489.1)
MCU_GPIO-84: J1.151 R21.2 SW1.1 U1.A11 | length 3290.9
  Primary Side w5.3: U1.A11@1631.5,-366.54 v1(1647.25,-350.79) ; v1(2990,-775) 2988.46,-773.46 SW1.1@2988.46,-733.46 2988.46,-690 2995,-683.46 v1(2995,-640) ; v1(3338.76,-1520.6) 3354.51,-1536.35 3354.51,-1615.04 J1.151@3354.45,-1615.1
  Inner Layer 4 w5.5: v1(1665.98,-213.54) 1725.39,-213.54 1725.54,-213.68 1889.13,-213.68 2081.54,-213.78 2092.02,-203.3 2674.75,-203.3 2699.44,-178.6 2932.86,-178.6 2950.86,-196.6 2950.86,-240.1 v1(2966.54,-255.1)
  Inner Layer 7 w5.5: v1(1647.25,-350.79) 1647.25,-247.82 1665.98,-229.09 v1(1665.98,-213.54)
  Inner Layer 8 w5.5: v1(2966.54,-255.1) 2966.54,-287.48 2970.06,-291.01 2970.06,-460.45 3006.06,-496.45 3006.06,-548.1 2995,-559.17 v1(2995,-640) 2995,-663.04 3125.25,-793.29 3125.25,-1076.91 3167.54,-1119.19 3167.54,-1163.48 3283.54,-1279.48 3344.98,-1279.48 3365.6,-1300.1 3365.6,-1347.35 3354.51,-1358.44 3354.51,-1504.85 v1(3338.76,-1520.6)
  Secondary Side w5.3: R21.2@2990,-800 v1(2990,-775)
MCU_GPIO-85_L: J1.152 U1.B11 | length 3151.1
  Primary Side w5.3: U1.B11@1631.5,-398.03 v1(1647.25,-382.28)
  Inner Layer 3 w5.5: v1(1647.25,-382.28) 1628.38,-363.42 1628.38,-341.78 1668.38,-301.78 1668.38,-251.78 1694.62,-225.54 2089.54,-225.54 2120.04,-195.03 2495.03,-195.03 2497.48,-197.48 v1(2926.54,-197.48)
  Inner Layer 7 w5.5: v1(2926.54,-197.48) 2951.54,-197.48 2990.26,-236.21 2990.26,-261.02 2976.24,-275.05 2976.24,-319.2 3012.06,-355.03 3012.06,-379.39 2997.91,-393.55 2997.91,-484.45 3006.16,-492.7 3006.16,-515.9 3029.25,-538.99 3029.25,-690.8 3127.05,-788.6 3127.05,-1078.71 3167.54,-1119.19 3167.54,-1134.48 3189.54,-1156.48 3189.54,-1184.48 3284.54,-1279.48 3345.51,-1279.48 3366.13,-1300.1 3366.13,-1347.35 3354.51,-1358.97 3354.51,-1504.85 v1(3370.26,-1520.6)
  Secondary Side w5.3: J1.152@3354.51,-1615.1 3354.51,-1536.35 v1(3370.26,-1520.6)
MCU_GPIO-86_L: J1.153 U1.C11 | length 3215.5
  Primary Side w5.3: U1.C11@1631.5,-429.53 v1(1647.25,-413.78) ; v1(3370.26,-1489.1) 3385.95,-1504.79 J1.153@3385.95,-1615.1
  Inner Layer 4 w5.5: v1(1644.01,-224.54) 1659.17,-239.7 1697.68,-239.7 1712.68,-224.7 2089.54,-224.7 2099.21,-215.03 2715.81,-215.03 2725.48,-224.7 2920.66,-224.7 2946.06,-250.1 2946.06,-265.1 2956.06,-275.1 2973.56,-275.1 2983.56,-265.1 v1(3016.18,-265.1)
  Inner Layer 7 w5.5: v1(1644.01,-224.54) 1642.68,-225.6 1631.5,-236.78 1631.5,-401.06 v1(1647.25,-413.78)
  Inner Layer 8 w5.5: v1(3016.18,-265.1) 3017.51,-266.43 3017.51,-373.95 3000.51,-390.95 3000.51,-472.9 3001.31,-472.9 3017.51,-489.1 3017.51,-530.08 3042.06,-554.63 3042.06,-692.1 3137.25,-787.29 3137.25,-1070.91 3200.54,-1134.19 3200.54,-1168.54 3298.47,-1266.48 3356.47,-1266.48 3385.94,-1295.95 3385.94,-1473.42 v1(3370.26,-1489.1)
MCU_GPIO-87_L: J1.154 U1.D11 | length 3155.1
  Primary Side w5.3: U1.D11@1631.5,-461.02 v1(1647.25,-445.27)
  Inner Layer 3 w5.5: v1(1647.25,-445.27) 1647.68,-441.78 1662.68,-426.78 1662.68,-337.48 1693.38,-306.78 1693.38,-249.69 1705.54,-237.54 2093.54,-237.54 2123.04,-208.03 2485.03,-208.03 2492.1,-215.1 2952.66,-215.1 2996.54,-258.98 v1(2996.54,-290.1)
  Inner Layer 7 w5.5: v1(2996.54,-290.1) 3024.06,-320.1 3024.06,-387.39 3009.41,-402.05 3009.41,-480 3018.06,-488.65 3018.06,-511.9 3041.25,-535.09 3041.25,-683.49 3138.66,-780.9 3138.66,-1072.32 3200.54,-1134.19 3200.54,-1169.48 3297.54,-1266.48 3357.01,-1266.48 3386.01,-1295.48 3386.01,-1473.35 v1(3401.76,-1489.1)
  Secondary Side w5.3: J1.154@3386.01,-1615.1 3386.01,-1504.85 v1(3401.76,-1489.1)
MCU_GPIO-88: J1.155 U1.C6 | length 3535.4
  Primary Side w5.3: v1(1458.27,-413.78) U1.C6@1474.02,-429.53 ; v1(3401.69,-1446.5) 3417.44,-1462.25 J1.155@3417.44,-1615.1
  Inner Layer 4 w5.5: v1(1477.96,-181.44) 1479.6,-179.8 1527.27,-179.8 1544.22,-162.86 1705.54,-162.86 1720.22,-177.54 2057.54,-177.54 2069.54,-165.54 2353.54,-165.54 2372.97,-146.1 2422.66,-146.1 2441.54,-164.98 2652.93,-164.98 2678.41,-139.5 2958.56,-139.5 v1(2986.54,-167.48)
  Inner Layer 8 w5.5: v1(1458.27,-413.78) 1474.02,-398.5 1474.02,-334.54 1481.5,-327.05 1481.5,-273.56 1490.03,-265.03 1490.03,-193.51 v1(1477.96,-181.44) ; v1(2986.54,-167.48) 3034.54,-215.48 3034.54,-376.92 3015.48,-395.97 3016.04,-466.8 3034.54,-485.3 3034.54,-518.1 3053.25,-536.82 3053.25,-685.29 3149.25,-781.29 3149.25,-1064.91 3218.54,-1134.19 3218.54,-1164.05 3308.97,-1254.48 3374.97,-1254.48 3420.97,-1300.48 3420.97,-1430 v1(3401.69,-1446.5)
MCU_GPIO-89: J1.156 U1.D6 | length 3531.6
  Primary Side w5.3: v1(1458.27,-445.27) U1.D6@1474.02,-461.02
  Inner Layer 3 w5.5: v1(1470.09,-209) 1491.49,-209 1527.46,-173.02 1681.02,-173.02 1697.54,-189.54 2073.54,-189.54 2109.54,-153.54 2353.54,-153.54 2373.54,-133.54 2445.54,-133.54 2457.54,-121.54 2520.2,-121.54 2557.21,-158.55 2685.47,-158.55 2690.74,-153.28 2947.34,-153.28 v1(3001.54,-207.48)
  Inner Layer 7 w5.5: v1(1458.27,-445.27) 1474.02,-429.01 1474.02,-252.31 1470.09,-248.37 v1(1470.09,-209) ; v1(3001.54,-207.48) 3036.06,-242.01 3036.06,-395.39 3022.71,-408.75 3022.71,-476 3030.06,-483.35 3030.06,-508 3054.06,-532 3054.06,-680.4 3153.28,-779.62 3153.28,-1068.94 3220.54,-1136.19 3220.54,-1167.48 3307.54,-1254.48 3374.51,-1254.48 3420.49,-1300.46 3420.49,-1435.5 v1(3433.19,-1446.5)
  Secondary Side w5.3: J1.156@3417.51,-1615.1 3417.51,-1462.18 v1(3433.19,-1446.5)
MCU_GPIO-90: J1.159 U1.A5 | length 3668.9
  Primary Side w5.3: v1(1426.77,-350.79) U1.A5@1442.52,-366.54 ; v1(3464.69,-1504.85) 3480.44,-1520.59 J1.159@3480.44,-1615.1
  Inner Layer 4 w5.5: v1(1426.54,-125.54) 1441.99,-125.54 1456.5,-111.02 1482.99,-111.02 1510.25,-83.76 1633.54,-83.76 1639.76,-77.54 1677.54,-77.54 1685.54,-85.54 1801.54,-85.54 1805.54,-89.54 1877.54,-89.54 1909.54,-57.54 1973.54,-57.54 2021.54,-105.54 2302,-105.54 2318,-89.54 2585.54,-89.54 2625.54,-129.54 2667.98,-129.54 2668.31,-129.2 2998.26,-129.2 v1(3021.54,-152.48)
  Inner Layer 8 w5.5: v1(1426.54,-125.54) 1426.77,-125.77 v1(1426.77,-350.79) ; v1(3021.54,-152.48) 3046.54,-177.48 3046.54,-384.92 3032.21,-399.25 3032.21,-463.4 3046.54,-477.73 3046.54,-512.1 3066.61,-532.18 3066.61,-680.65 3162.06,-776.1 3162.06,-1059.72 3235.54,-1133.19 3235.54,-1160.48 3318.54,-1243.48 3416.96,-1243.48 3480.44,-1306.96 3480.44,-1489.1 v1(3464.69,-1504.85)
MCU_GPIO-91: J1.160 R26.2 U1.B5 | length 3737
  Primary Side w5.3: v1(1426.77,-382.28) U1.B5@1442.52,-398.03
  Inner Layer 3 w5.5: v1(1531.97,-99.49) 1593.54,-161.02 1685.02,-161.02 1701.54,-177.54 2069.54,-177.54 2105.54,-141.54 2266.46,-141.54 2286.5,-121.5 2432.04,-121.5 2448,-105.54 2529.54,-105.54 2565.54,-141.54 2672.48,-141.54 2686.54,-127.48 2971.54,-127.48 v1(3026.54,-182.48)
  Inner Layer 7 w5.5: v1(3026.54,-182.48) 3046.56,-202.5 3046.56,-262.48 3046.46,-400 3034.11,-412.35 3034.11,-470.4 3040.54,-476.83 3040.54,-502.58 3066.6,-528.64 3066.6,-677.04 3165.16,-775.6 3165.16,-1062.82 3236.51,-1134.17 3236.51,-1159.48 3320.51,-1243.48 3414.51,-1243.48 3480.44,-1309.41 3480.44,-1504.85 v1(3496.19,-1520.6)
  Inner Layer 8 w5.5: v1(1426.77,-382.28) 1442.48,-366.57 1442.48,-338.02 1469.51,-310.99 1469.51,-236.11 1452.51,-219.11 1452.51,-167.51 1467.74,-152.29 1516.48,-152.29 1531.97,-136.8 v1(1531.97,-99.49)
  Secondary Side w5.3: R26.2@1525,-60 1531.97,-60 v1(1531.97,-99.49) ; J1.160@3480.51,-1615.1 3480.51,-1536.29 v1(3496.19,-1520.6)
MCU_GPIO-92_L: J1.161 R25.1 U1.A4 | length 4199.8
  Primary Side w5.3: v1(1395.27,-350.79) U1.A4@1411.02,-366.54 ; v1(3496.19,-1489.1) 3511.93,-1504.84 J1.161@3511.93,-1615.1
  Inner Layer 3 w5.5: v1(1395.27,-350.79) 1410.98,-366.49 1410.98,-393.54 1414.98,-397.54 1587.99,-397.54 1600.99,-410.54 1600.99,-451.78 1610.24,-461.02 1721.17,-461.02 1752.68,-429.52 2413.48,-429.52 2469.46,-373.54 2645.54,-373.54 2744.1,-472.1 2980.28,-472.1 3011.68,-440.7 v1(3076.68,-440.7) ; v1(1409.54,-109.54) 1435.06,-109.54 1437.54,-112.01 1482.01,-112.01 1510.99,-83.02 1547.02,-83.02 v1(1565.54,-101.54)
  Inner Layer 7 w5.5: v1(1395.27,-350.79) 1395.27,-286.54 1416.68,-265.13 1416.68,-144.68 1409.54,-137.54 v1(1409.54,-109.54)
  Inner Layer 8 w5.5: v1(1565.54,-101.54) 1565.54,-65.43 1585.43,-45.54 1585.43,217.44 1571.71,231.16 v1(1571.71,260.16) ; v1(3076.68,-440.7) 3087.54,-451.55 3087.54,-511.48 3078.06,-520.95 3078.06,-674.1 3202.04,-798.08 3202.04,-1081.69 3250.54,-1130.19 3250.54,-1136.48 3344.54,-1230.48 3446.46,-1230.48 3511.94,-1295.97 3511.94,-1473.35 v1(3496.19,-1489.1)
  Secondary Side w5.3: R25.1@1510,260 1531.6,281.6 1549.96,281.6 1571.56,260 v1(1571.71,260.16)
MCU_GPIO-93_L: J1.162 U1.B4 | length 3303.8
  Primary Side w5.5: v1(1395.27,-382.28) U1.B4@1411.02,-398.03
  Inner Layer 4 w5.5: v1(1395.27,-382.28) 1411.02,-398.03 1466.13,-398.03 1474.01,-405.91 1474.01,-452.52 1482.51,-461.02 1781.52,-461.02 1789.06,-453.49 1789.06,-403.54 1794.56,-398.03 1922.09,-398.03 1939.53,-415.47 2706.97,-415.47 2715.98,-424.49 2805.51,-424.49 2839.53,-390.47 2929.53,-390.47 2949.53,-410.47 v1(3059.53,-410.47)
  Inner Layer 7 w5.5: v1(3059.53,-410.47) 3059.53,-435.47 3055.18,-439.82 3055.18,-501.32 3078.06,-524.2 3078.06,-672.6 3207.98,-802.52 3207.98,-1087.63 3251.54,-1131.19 3251.54,-1136.48 3345.54,-1230.48 3448.01,-1230.48 3511.94,-1294.41 3511.94,-1473.35 v1(3527.69,-1489.1)
  Secondary Side w5.5: J1.162@3512.01,-1615.1 3512.01,-1504.79 v1(3527.69,-1489.1)
MCU_GPIO-94: J1.163 U1.A3 | length 3948.5
  Primary Side w5.3: v1(1363.78,-350.79) U1.A3@1379.53,-366.54 ; v1(3531.97,-1519.49) 3543.43,-1530.95 J1.163@3543.43,-1615.1
  Inner Layer 4 w5.5: v1(1363.03,-112.52) 1363.53,-112.02 1384.03,-91.53 1390.66,-91.53 1408.65,-73.54 1625.54,-73.54 1633.54,-65.54 1685.54,-65.54 1693.54,-73.54 1809.54,-73.54 1813.54,-77.54 1873.54,-77.54 1905.54,-45.54 1977.54,-45.54 2025.54,-93.54 2298.46,-93.54 2314.46,-77.54 2351,-77.54 2384.54,-44 2410.46,-44 2444,-77.54 2597.54,-77.54 2637.54,-117.54 2658.48,-117.54 2658.54,-117.48 2911.54,-117.48 2921.54,-107.48 v1(3117.54,-107.48)
  Inner Layer 8 w5.5: v1(1363.03,-112.52) 1348.03,-127.52 1348.03,-306.55 1364,-322.52 1364,-350.56 v1(1363.78,-350.79) ; v1(3117.54,-107.48) 3117.54,-335.48 3076.97,-376.05 3076.97,-417.36 3098.04,-438.43 3098.04,-524.98 3090.06,-532.95 3090.06,-668.1 3217.47,-795.51 3217.47,-1079.13 3266.54,-1128.19 3266.54,-1135.48 3347.54,-1216.48 3473.95,-1216.48 3543.44,-1285.97 3543.44,-1508.01 v1(3531.97,-1519.49)
MCU_GPIO-96: J9.18 U1.C3 | length 852.5
  Primary Side w5.3: v1(1363.78,-413.78) U1.C3@1379.53,-429.53
  Inner Layer 4 w5.5: v1(1238.03,-382.52) 1240.49,-382.52 1256,-398.03 1349,-398.03 v1(1363.78,-413.78)
  Inner Layer 7 w5.5: v1(1225.18,196.53) 1225.18,105.16 1215.95,95.92 1215.95,60.24 1263.03,13.16 1263.03,-180.52 1285.51,-203 1285.51,-243.02 1277.02,-251.52 1259.03,-251.52 1251.03,-259.52 1251.03,-284.52 1263.03,-296.52 1263.03,-357.52 v1(1238.03,-382.52)
  Secondary Side w5.3: J9.18@1225.2,157.16 v1(1225.18,196.53)
MCU_GPIO-97: J9.17 U1.A2 | length 632
  Primary Side w5.3: v1(1332.28,-350.79) U1.A2@1348.03,-366.54
  Inner Layer 4 w5.5: v1(1213,-81) 1216.97,-79.49 1236.97,-79.49 1248.94,-67.52 1331.48,-67.52 1339.99,-76.03 1355.48,-76.03 v1(1355.48,-75.03)
  Inner Layer 8 w5.5: v1(1332.28,-350.79) 1332.28,-332.02 1302.51,-302.25 1302.51,-275.02 1315.03,-262.5 1315.03,-238.02 1336.22,-216.84 1336.22,-107.82 1355.48,-88.14 v1(1355.48,-75.03)
  Secondary Side w5.3: v1(1213,-81) 1213,-71.2 1235.2,-49 1235.2,-21 1225.2,-11 J9.17@1225.2,53.22
MCU_GPIO-98: J9.4 U1.F1 | length 985.9
  Primary Side w5.3: v1(1300.79,-508.27) U1.F1@1316.54,-524.02
  Inner Layer 3 w5.5: v1(1098.5,-227.52) 1199.02,-227.52 1238.51,-188.02 1280.51,-188.02 v1(1304.51,-212.02)
  Inner Layer 7 w5.5: v1(1098.5,-227.52) 1098.5,-201.96 1070.54,-173.99 1070.54,-106.46 1094,-82.99 1094,-49.49 1086.97,-42.46 1086.97,32.48 1114.96,60.51 v1(1114.96,117.78)
  Inner Layer 8 w5.5: v1(1300.79,-508.27) 1285,-492.48 1285,-330.49 1290.51,-324.98 1290.51,-263.52 1304.51,-249.52 v1(1304.51,-212.02)
  Secondary Side w5.3: v1(1114.96,117.78) J9.4@1114.96,157.16
MCU_GPIO-99: J9.5 U1.G1 | length 868.3
  Primary Side w5.3: v1(1300.79,-539.76) U1.G1@1316.54,-555.51
  Inner Layer 3 w5.5: v1(1132,-271) 1173.03,-271 1184.55,-282.52 1241.03,-282.52 1252.55,-271 v1(1274.51,-271)
  Inner Layer 7 w5.5: v1(1130.71,92.6) 1130.71,2.95 1116.5,-12.36 1116.5,-138.96 1132,-154.46 v1(1132,-271)
  Inner Layer 8 w5.5: v1(1274.51,-271) 1274.51,-510.98 v1(1300.79,-539.76)
  Secondary Side w5.3: J9.5@1130.71,53.22 v1(1130.71,92.6)
MCU_GPIO-100: J9.6 U1.H1 | length 1068.2
  Primary Side w5.3: v1(1300.79,-571.26) U1.H1@1316.54,-587.01
  Inner Layer 3 w5.5: v1(1071.97,-254.49) 1115.95,-254.49 1126.97,-243.47 v1(1236.53,-243.47)
  Inner Layer 7 w5.5: v1(1071.97,-254.49) 1071.97,-205.43 1057.54,-190.99 1057.54,-91.43 1071.97,-76.99 1071.97,105.5 1131,164.53 v1(1131,192)
  Inner Layer 8 w5.5: v1(1236.53,-243.47) 1236.53,-294.53 1253.51,-311.51 1253.51,-531.87 1292.9,-571.26 v1(1300.79,-571.26)
  Secondary Side w5.3: J9.6@1130.71,157.16 1130.71,191 v1(1131,192)
MCU_GPIO-101: J9.7 U1.H2 | length 799
  Primary Side w5.3: v1(1332.28,-571.26) U1.H2@1348.03,-587.01
  Inner Layer 8 w5.5: v1(1235.51,-215.97) 1249.51,-229.97 1249.51,-232.77 1255.77,-239.02 1255.77,-281.77 1263.8,-289.8 1263.8,-526.41 1292.87,-555.48 1316.5,-555.48 v1(1332.28,-571.26)
  Secondary Side w5.3: J9.7@1146.46,53.22 1146.46,-5 1111.03,-40.43 1111.03,-145.52 1182.03,-216.52 1234.96,-216.52 v1(1235.51,-215.97)
MCU_GPIO-102: J9.8 U1.H3 | length 936.2
  Primary Side w5.3: v1(1363.78,-571.26) U1.H3@1379.53,-587.01
  Inner Layer 3 w5.5: v1(1146.43,117.78) 1170.09,94.13 1201.59,94.13 1226.75,68.97 1264.59,68.97 v1(1288.21,92.6)
  Inner Layer 7 w5.5: v1(1288.21,92.6) 1288.21,62.4 1279.03,53.22 1279.03,-139.54 1348.03,-208.54 1348.03,-555.51 v1(1363.78,-571.26)
  Secondary Side w5.3: v1@1146.46,117.78 J9.8@1146.46,157.16
MCU_GPIO-103: J9.9 U1.J1 | length 790.8
  Primary Side w5.3: v1(1300.79,-602.75) U1.J1@1316.54,-618.5
  Inner Layer 7 w5.5: v1(1146.97,-34.49) 1155,-42.52 1155,-105.99 1160.54,-111.53 1160.54,-267.06 1207.51,-314.03 v1(1207.51,-334.02)
  Inner Layer 8 w5.5: v1(1207.51,-334.02) 1187.51,-354.02 1187.51,-399.02 1203.51,-415.02 1203.51,-449.02 1212,-457.51 1212,-560.51 1254.24,-602.75 v1(1300.79,-602.75)
  Secondary Side w5.3: v1(1146.97,-34.49) 1161.62,-14.35 1162.21,-13.71 J9.9@1162.21,53.22
MCU_GPIO-104: J9.11 U1.J2 | length 805.9
  Primary Side w5.3: v1(1332.28,-602.75) U1.J2@1348.03,-618.5
  Inner Layer 7 w5.5: v1(1173.03,-77.52) 1173.03,-249.52 1238,-314.49 v1(1238,-335)
  Inner Layer 8 w5.5: v1(1238,-335) 1238,-353.02 1220.51,-370.51 1220.51,-401.54 1241.54,-422.56 1241.54,-573.05 1255.49,-587 1320,-587 v1@1334,-601
  Secondary Side w5.3: v1(1173.03,-77.52) 1173.03,-62.44 1187.95,-47.52 1187.95,-17.52 1177.81,-7.38 1177.95,-7.24 J9.11@1177.95,53.22
MCU_GPIO-105: J9.12 U1.J3 | length 1023
  Primary Side w5.3: v1(1363.78,-602.75) U1.J3@1379.53,-618.5
  Inner Layer 8 w5.5: v1(1177.96,120.16) 1203.18,145.38 1241.71,145.38 1257.01,130.08 1257.01,112 1272,97.01 1272,59.96 1285.02,46.94 1359.84,46.94 1382.68,24.1 1382.68,-0.02 1365.54,-17.17 1365.54,-56.88 1382.68,-74.02 1382.68,-123.18 1358.53,-147.33 1358.53,-297.52 1379.53,-318.52 1379.53,-586.03 v1(1363.78,-602.75)
  Secondary Side w5.3: v1(1177.96,120.16) J9.12@1177.95,157.16
MCU_GPIO-106: J9.13 U1.L2 | length 1039.2
  Primary Side w5.3: v1(1332.28,-697.25) U1.L2@1348.03,-681.5
  Inner Layer 4 w5.5: v1(1152.51,-684.02) 1181.02,-684.02 1183.51,-681.54 1316.57,-681.54 v1(1332.28,-697.25)
  Inner Layer 7 w5.5: v1(1194,1) 1194,-22.52 1188.03,-28.49 1188.03,-57.52 1193.03,-62.52 1193.03,-91.46 1186.97,-97.52 1186.97,-131.52 1206.48,-151.03 1206.48,-171.06 1194.51,-183.02 1194.51,-209.54 1217,-232.02 v1(1216.97,-259.49)
  Inner Layer 8 w5.5: v1(1152.51,-684.02) 1141.6,-673.11 1141.6,-642.94 1199.25,-585.29 1199.25,-465.19 1166.54,-432.48 1166.54,-398.98 1176.54,-388.98 1176.54,-336.14 1182.66,-330.02 1182.66,-293.8 v1(1216.97,-259.49)
  Secondary Side w5.3: J9.13@1193.7,53.22 1193.7,1.3 v1(1194,1)
MCU_GPIO-107: J9.14 U1.L3 | length 1046.1
  Primary Side w5.3: v1(1363.78,-697.25) U1.L3@1379.53,-681.5
  Inner Layer 3 w5.5: v1(1266.51,-215.03) 1283.02,-215.03 1314.5,-246.52 v1(1332.28,-246.52)
  Inner Layer 7 w5.5: v1(1193.68,196.53) 1193.68,58.48 1244,8.16 1244,-107.02 1250.51,-113.54 1250.51,-199.03 v1(1266.51,-215.03)
  Inner Layer 8 w5.5: v1(1332.28,-246.52) 1332.28,-268.02 1337.51,-273.25 1337.51,-315.75 1348.03,-326.27 1348.03,-682 v1(1363.78,-697.25)
  Secondary Side w5.3: J9.14@1193.7,157.16 v1(1193.68,196.53)
MCU_GPIO-108: J9.15 U1.L4 | length 1042.9
  Primary Side w5.3: U1.L4@1411.02,-681.5 v1(1426.77,-697.25)
  Inner Layer 4 w5.5: v1(1209,-40) 1273.52,-40 1278.56,-45.03 1349.54,-45.03 1369.03,-25.54 1409.54,-25.54 1413.54,-29.54 v1(1425.54,-29.54)
  Inner Layer 7 w5.5: v1(1425.54,-29.54) 1442.99,-46.99 1442.99,-164.32 1433.03,-174.28 1433.03,-270.51 1411.02,-292.52 1411.02,-678.47 v1(1426.77,-697.25)
  Secondary Side w5.3: v1(1209,-40) 1213.03,-39.55 1213.03,18.9 1209.45,22.48 J9.15@1209.45,53.22
MCU_GPIO-109: J9.16 U1.N2 | length 1340.9
  Primary Side w5.3: v1(1332.28,-760.24) U1.N2@1348.03,-744.49
  Inner Layer 4 w5.5: v1(1117.51,-748.02) 1132.3,-748.02 1144.51,-760.24 1219.95,-760.24 1254.55,-794.84 1271.95,-794.84 1290.95,-775.84 1316.34,-775.84 1331.95,-760.24 v1(1332.28,-760.24)
  Inner Layer 8 w5.5: v1(1117.51,-748.02) 1117.51,-719.02 1110.51,-712.02 1110.51,-637.02 1136.82,-610.72 1136.82,-567.97 1175.5,-529.29 1175.5,-476.47 1139.34,-440.32 1139.34,-406.36 1127.53,-394.55 1111.78,-394.55 1095.55,-378.32 1095.55,-345 1167.24,-273.31 1167.24,-245.52 1196.03,-216.73 1209.81,-216.73 1254.53,-172.01 1254.53,39.53 1209.46,84.06 v1(1209.46,120.16)
  Secondary Side w5.3: v1@1209.45,120.16 J9.16@1209.45,157.16
MCU_GPIO-110: J9.50 U1.M2 | length 1153.9
  Primary Side w5.3: v1(1332.28,-728.74) U1.M2@1348.03,-712.99
  Inner Layer 4 w5.5: v1(1319.51,-288.02) v1(1446.51,-288.02)
  Inner Layer 7 w5.5: v1(1319.51,-288.02) 1319.51,-325.05 1316.54,-328.02 1316.54,-713 v1(1332.28,-728.74)
  Inner Layer 8 w5.5: v1(1446.51,-288.02) 1446.51,-240.02 1438.51,-232.02 1438.51,-161.98 1443.23,-157.26 1443.23,-79.76 1476.97,-46.02 1476.97,37.16 1461.46,52.66 1461.46,96.65 1477.18,112.14 v1(1477.18,196.53)
  Secondary Side w5.3: J9.50@1477.17,157.16 v1(1477.18,196.53)
MCU_GPIO-111: J9.2 U1.M4 | length 1256.1
  Primary Side w5.3: v1(1395.27,-728.74) U1.M4@1411.02,-712.99 v1(1395.27,-697.24)
  Inner Layer 8 w5.5: v1(1099,193) 1099,169.96 1111.77,157.19 1298.51,157.19 1319.51,136.19 1319.51,112.98 1335.51,96.98 1335.51,75.75 1352.51,58.75 1382.71,58.75 1414.21,27.25 1414.21,-10.02 1405.99,-18.25 1405.99,-36.02 1412.99,-43.02 1412.99,-69.01 1393.98,-88.02 1393.98,-128.08 1411.02,-145.12 1411.02,-681.49 v1(1395.27,-697.24)
  Secondary Side w5.3: v1(1099,193) 1099.21,192 J9.2@1099.21,157.16
MCU_GPIO-112: J9.3 U1.M3 | length 1134.9
  Primary Side w5.3: v1(1363.78,-728.74) U1.M3@1379.53,-712.99
  Inner Layer 4 w5.5: v1(1130.51,-703.02) 1130.51,-702.54 1213.01,-702.54 1223.46,-712.99 1348.03,-712.99 v1(1363.78,-728.74)
  Inner Layer 7 w5.5: v1(1114.96,13.85) 1104.53,3.41 1104.53,-142.98 1119.53,-157.98 1119.53,-237.52 1107.03,-250.02 1107.03,-291.52 1131.51,-316 v1(1161.03,-316)
  Inner Layer 8 w5.5: v1(1130.51,-703.02) 1130.51,-634.02 1188.25,-576.29 1188.25,-472.69 1151.16,-435.6 1151.16,-396.22 1135.41,-380.47 1135.41,-360.64 1161.03,-335.01 v1(1161.03,-316)
  Secondary Side w5.3: v1@1114.96,13.85 J9.3@1114.96,53.22
MCU_GPIO-113: J9.47 U1.N4 | length 930.7
  Primary Side w5.3: v1(1395.27,-760.24) U1.N4@1411.02,-744.49
  Inner Layer 7 w5.5: v1(1395.27,-760.24) 1379.53,-741.93 1379.53,-277.93 1400.68,-256.78 1400.68,-144.68 1384.49,-128.49 1384.49,-96.03 1376.49,-88.03 1376.49,-68.02 1365.54,-57.07 1365.54,-37.54 1394.88,-8.19 1439.43,-8.19 v1(1461.46,13.85)
  Secondary Side w5.3: J9.47@1461.42,53.22 1461.42,13.89 v1(1461.46,13.85)